# Altium PCB STM32F407VET6_4Layer_PCB.PcbDoc (part 3 of 3)
Units mm, origin at the board's own origin, x right, y up, seen from the top; angles counter-clockwise.
Board outline 86 x 80 mm, 4 copper layers (L1, L2, L3, L4), stack 0.999 mm thick; 172 components, 128 nets, 654 pads, 524 vias.
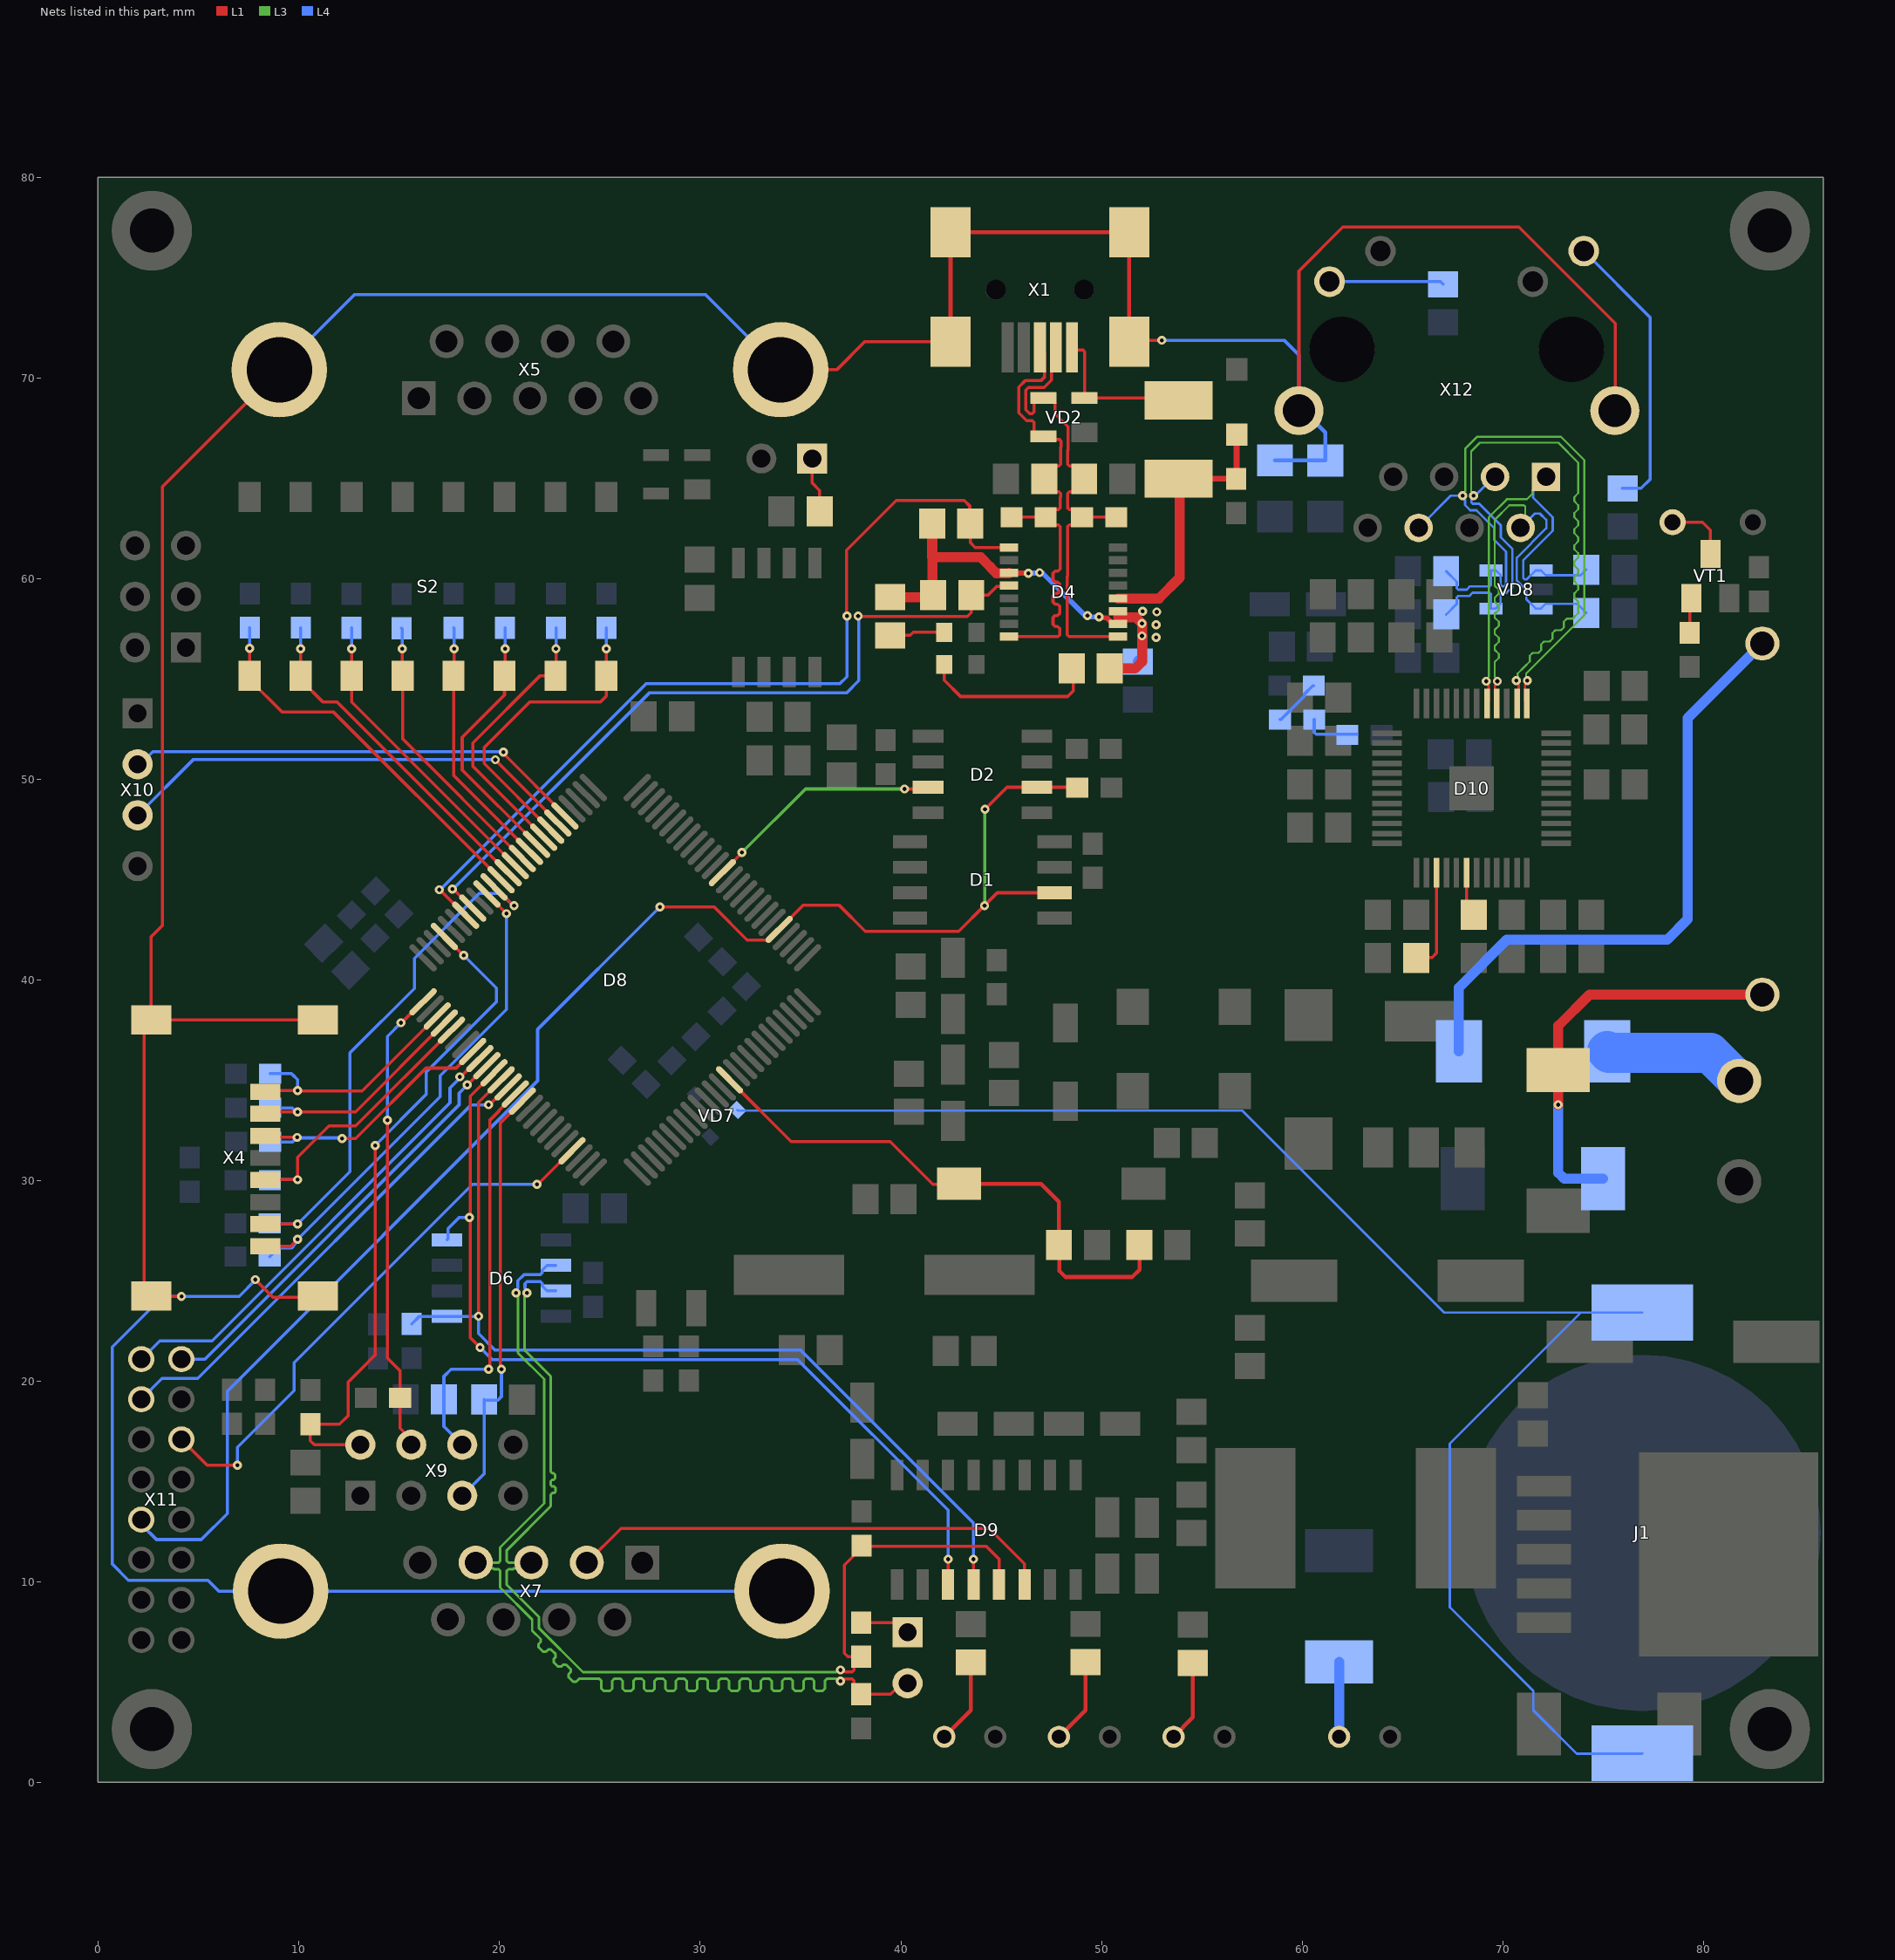
[diagram p5: the nets of this part, all layers, seen from the top]

## Via types
v1: diameter 0.45, hole 0.2, L1 to L4, 524 vias

## Nets (pads, with @x,y where several pads share a name; then routed paths per layer and width w, separated by ;. In a path a pad name is that pad's centre, name@x,y a point inside that pad or via, vN(x,y) a via of type N, cw(c..) or ccw(c..) an arc to the next point about the centre after c; other vN are vias at no path point) (continued)
NetD10_39: D10.39 R46.1 | length 5.1
  L1 w0.155: R46.1@65.684,41.097 65.709,41.121 66.476,41.121 66.7,41.346 D10.39@66.7,45.339
NetD10_42: D10.42 R47.1 | length 2.2
  L1 w0.155: D10.42@68.199,45.339 68.199,43.612 R47.1@68.555,43.256
NetF1_2: F1.2 R4.1 | length 31.3
  L4 w0.5: F1.2@67.818,36.449 67.818,39.624 70.206,42.012 78.207,42.012 79.223,43.028 79.223,53.053 R4.1@82.942,56.772
NetF2_1: F2.1 VD2.2 X1.1 | length 9.1
  L1 w0.155: X1.1@48.529,71.517 48.641,71.405 49.067,71.405 49.158,71.314 VD2.2@49.158,69.007 F2.1@55.072,69.007 ; F2.1@53.8,68.933 F2.1@53.896,68.837
NetG1_2: G1.2 VT1.C | length 3.2
  L1 w0.155: G1.2@78.467,62.814 79.954,62.814 80.35,62.418 VT1.C@80.35,61.23
NetHL1_1: HL1.1 R8.2 | length 3.7
  L4 w0.5: HL1.1@61.849,2.286 R8.2@61.849,6.02
NetHL2_1: HL2.1 R23.2 | length 9.5
  L1 w0.155: HL2.1@42.139,56.109 42.088,56.058 42.088,55.539 HL2.1@42.164,55.463 ; HL2.1@42.164,55.728 HL2.1@42.164,55.463 ; R23.2@48.514,55.524 48.59,55.448 48.59,54.407 48.311,54.127 42.977,54.127 42.164,54.94 HL2.1@42.164,55.463
NetHL3_1: HL3.1 R24.2 | length 2.8
  L1 w0.155: R24.2@39.472,57.175 40.462,57.175 40.615,57.328 HL3.1@42.164,57.328
NetHL4_1: HL4.1 R32.2 | length 4.1
  L1 w0.2: HL4.1@53.594,2.286 54.559,3.251 R32.2@54.559,5.969
NetHL5_1: HL5.1 R33.2 | length 4.3
  L1 w0.2: HL5.1@42.164,2.286 43.485,3.607 R33.2@43.485,5.994
NetHL6_1: HL6.1 R34.2 | length 4.3
  L1 w0.2: HL6.1@47.879,2.286 49.2,3.607 R34.2@49.2,6.01
NetJ1_1: J1.1 J1.2 VD7.1 | length 79.9
  L4 w0.119: VD7.1@31.852,33.528 31.887,33.493 57.008,33.493 67.069,23.431 73.901,23.431 ; J1.2@76.962,1.461 76.949,1.448 73.685,1.448 71.526,3.607 71.526,4.572 67.361,8.738 67.361,16.891 73.901,23.431 ; J1.1@76.962,23.431 73.901,23.431
NetR4_2: R4.2 VD1.1 VD3.1 | length 20.5
  L1 w0.5: v1(72.771,33.782) VD3.1@72.771,35.504 72.771,37.719 74.324,39.272 R4.2@82.942,39.272
  L4 w0.5: v1(72.771,33.782) 72.771,30.392 73.064,30.099 VD1.1@75.001,30.099
NetR9_2: R9.2 X3.1 | length 2.8
  L1 w0.155: X3.1@35.585,65.989 35.585,64.77 35.951,64.404 R9.2@35.951,63.348
NetR21_1: R21.1 X6.1 | length 2.5
  L1 w0.155: R21.1@38.024,7.976 39.853,7.976 X6.1@40.335,7.493
NetR39_2: R39.2 VT1.B | length 1.8
  L1 w0.155: R39.2@79.324,57.302 79.324,58.953 VT1.B@79.4,59.03
NetR44_2: R44.2 R51.1 | length 2.8
  L4 w0.155: R51.1@60.604,52.984 60.604,52.339 60.695,52.248 R44.2@62.74,52.248
NetR51_2: R51.2 R53.1 | length 2.4
  L4 w0.155: R51.2@58.904,52.984 58.954,52.984 60.106,54.136 60.106,54.238 60.529,54.661 R53.1@60.579,54.661
NetR69_1: R69.1 X12.9 | length 14.3
  L4 w0.155: X12.9@74.041,76.327 77.343,73.025 77.343,64.948 76.896,64.501 R69.1@75.971,64.501
NetR70_1: R70.1 X12.12 | length 5.7
  L4 w0.155: X12.12@61.366,74.803 66.899,74.803 R70.1@67.031,74.671
NJRST: D8.90 R36.1 X9.5 | length 21.4
  L1 w0.155: v1(20.091,20.599) 20.041,20.65 20.041,32.871 D8.90@21.135,33.965
  L4 w0.155: X9.5@18.136,14.3 19.233,15.397 R36.1@19.233,19.101 19.284,19.05 19.899,19.05 20.091,19.242 v1(20.091,20.599)
NRST: C36.1 D8.14 R31.1 S1.1 | length 27.9
  L1 w0.155: D8.14@31.458,35.025 34.531,31.953 39.472,31.953 39.472,31.942 41.594,29.82 42.873,29.82 S1.1@42.898,29.845
  L1 w0.2: S1.1@42.898,29.845 46.99,29.845 47.879,28.956 C36.1@47.879,26.797 47.904,26.772 47.904,25.502 48.209,25.197 51.537,25.197 51.892,25.552 51.892,26.787 R31.1@51.882,26.797
nW: D2.3 D8.38 | length 12
  L1 w0.155: D8.38@31.105,45.349 31.105,45.364 32.08,46.34 v1(32.08,46.355) ; v1(40.183,49.521) 41.272,49.521 D2.3@41.357,49.606
  L3 w0.155: v1(32.08,46.355) 35.246,49.521 v1(40.183,49.521)
PD3: D8.84 X11.1 | length 23.5
  L1 w0.155: v1(18.014,35.175) 18.063,35.175 18.974,36.086 D8.84@19.013,36.086
  L4 w0.155: X11.1@2.14,21.106 3.056,22.022 5.664,22.022 17.526,33.884 17.526,34.62 18.014,35.109 v1(18.014,35.175)
PD4: D8.85 X11.2 | length 21.6
  L1 w0.155: v1(18.39,34.773) 18.398,34.773 19.358,35.733 D8.85@19.367,35.733
  L4 w0.155: X11.2@4.14,21.106 5.308,21.106 17.983,33.782 17.983,34.366 v1(18.39,34.773)
PD7: D8.88 X11.3 | length 24.7
  L1 w0.155: v1(19.456,33.782) 19.498,33.782 20.388,34.672 D8.88@20.427,34.672
  L4 w0.155: X11.3@2.14,19.106 3.176,20.142 4.953,20.142 18.593,33.782 v1(19.456,33.782)
PE0: D8.97 X11.6 | length 27.8
  L1 w0.155: X11.6@4.14,17.106 5.422,15.824 v1(6.934,15.824) ; v1(21.869,29.82) 21.904,29.82 23.575,31.49 D8.97@23.609,31.49
  L4 w0.155: v1(6.934,15.824) 6.934,16.713 9.754,19.533 9.754,20.93 18.644,29.82 v1(21.869,29.82)
RD_N: D10.13 R65.1 VD8.5 X12.6 | length 35.9
  L1 w0.119: D10.13@71.196,53.772 71.116,53.852 71.116,54.517 71.114,54.519 71.114,54.71 71.23,54.825 v1(71.23,54.915)
  L3 w0.1: v1(68.005,64.135) 68.005,64.23 68.13,64.355 68.13,66.471 68.735,67.077 72.895,67.077 74.066,65.905 74.066,58.598 74.066,58.169 71.164,55.266 71.164,54.981 v1(71.23,54.915)
  L4 w0.119: X12.6@65.811,62.535 67.412,64.135 v1(68.005,64.135) 68.005,64.045 68.12,63.93 68.12,63.669 68.377,63.413 68.698,63.413 69.585,62.526 69.585,61.926 70.166,61.344 70.166,59.721 70.066,59.621 69.967,59.621 69.898,59.691 69.898,60.171 69.657,60.411 VD8.5@69.413,60.411 69.413,59.691 69.343,59.621 68.368,59.621 68.204,59.457 67.778,59.457 67.708,59.527 67.708,59.845 R65.1@67.178,60.376
RD_P: D10.14 R63.1 VD8.4 X12.3 | length 35.9
  L1 w0.119: v1(70.68,54.915) 70.68,54.825 70.795,54.71 70.795,54.519 70.794,54.517 70.794,53.852 D10.14@70.714,53.772
  L3 w0.1: v1(68.555,64.135) 68.555,64.23 68.43,64.355 68.43,66.347 68.859,66.777 72.771,66.777 73.766,65.781 73.766,64.313 73.766,64.263 73.566,64.063 73.566,63.863 73.766,63.663 73.766,63.463 73.566,63.263 73.566,63.063 73.766,62.863 73.766,62.663 73.566,62.463 73.566,62.263 73.766,62.063 73.766,61.863 73.566,61.663 73.566,61.463 73.766,61.263 73.766,61.063 73.566,60.863 73.566,60.663 73.766,60.463 73.766,60.263 73.566,60.063 73.566,59.863 73.766,59.663 73.766,59.463 73.566,59.263 73.566,59.063 73.766,58.863 73.766,58.598 73.766,58.293 73.51,58.037 73.475,58.001 73.192,58.001 73.05,57.86 73.05,57.577 72.909,57.436 72.626,57.436 72.485,57.294 72.485,57.011 72.343,56.87 72.06,56.87 71.919,56.728 71.919,56.446 71.778,56.304 71.495,56.304 71.353,56.163 71.353,55.88 71.079,55.605 70.747,55.273 70.747,54.982 v1(70.68,54.915)
  L4 w0.119: R63.1@67.183,58.217 67.711,58.745 67.711,59.068 67.781,59.138 68.336,59.138 68.5,59.302 69.343,59.302 69.413,59.232 VD8.4@69.413,58.511 69.657,58.511 69.898,58.752 69.898,59.232 69.967,59.302 70.198,59.302 70.485,59.589 70.485,61.476 69.904,62.058 69.904,62.658 68.83,63.732 68.509,63.732 68.439,63.801 68.439,63.93 68.555,64.045 v1(68.555,64.135) 68.618,64.135 69.558,65.075 X12.3@69.621,65.075
RS485_N: D6.6 R22.2 X6.2 X7.4 | length 56.2
  L1 w0.155: v1(36.982,5.066) 37.039,5.122 37.18,5.122 37.221,5.163 37.576,5.163 37.667,5.072 37.667,4.763 R22.2@38.024,4.406 39.493,4.406 40.04,4.953 X6.2@40.335,4.953
  L3 w0.13: v1(20.811,24.409) 20.811,24.323 20.921,24.213 20.921,21.411 22.22,20.112 22.22,13.914 20.028,11.722 20.028,11.044 19.952,10.968 X7.4@18.808,10.968 19.106,10.67 19.686,10.67 19.718,10.638 19.952,10.638 20.028,10.562 20.028,9.721 21.623,8.126 21.623,7.577 21.623,7.573 21.667,7.529 22.042,7.154 22.042,7.004 21.941,6.904 21.941,6.754 22.166,6.529 22.316,6.529 22.417,6.629 22.566,6.629 22.791,6.405 22.791,6.255 22.691,6.154 22.691,6.004 22.916,5.78 23.066,5.78 23.166,5.88 23.316,5.88 23.541,5.655 23.541,5.505 23.44,5.405 23.44,5.255 23.665,5.03 23.815,5.03 23.961,5.176 24.251,5.176 24.377,5.176 24.972,5.176 25.078,5.07 25.078,4.682 25.184,4.576 25.502,4.576 25.608,4.682 25.608,5.07 25.714,5.176 26.032,5.176 26.138,5.07 26.138,4.682 26.244,4.576 26.562,4.576 26.668,4.682 26.668,5.07 26.774,5.176 27.092,5.176 27.198,5.07 27.198,4.682 27.304,4.576 27.622,4.576 27.728,4.682 27.728,5.07 27.834,5.176 28.152,5.176 28.258,5.07 28.258,4.682 28.364,4.576 28.682,4.576 28.788,4.682 28.788,5.07 28.894,5.176 29.212,5.176 29.318,5.07 29.318,4.682 29.424,4.576 29.742,4.576 29.848,4.682 29.848,5.07 29.954,5.176 30.272,5.176 30.378,5.07 30.378,4.682 30.484,4.576 30.802,4.576 30.908,4.682 30.908,5.07 31.014,5.176 31.332,5.176 31.438,5.07 31.438,4.682 31.544,4.576 31.862,4.576 31.968,4.682 31.968,5.07 32.074,5.176 32.392,5.176 32.498,5.07 32.498,4.682 32.604,4.576 32.922,4.576 33.028,4.682 33.028,5.07 33.134,5.176 33.452,5.176 33.558,5.07 33.558,4.682 33.664,4.576 33.982,4.576 34.088,4.682 34.088,5.07 34.194,5.176 34.512,5.176 34.618,5.07 34.618,4.682 34.724,4.576 35.042,4.576 35.148,4.682 35.148,5.07 35.254,5.176 35.572,5.176 35.678,5.07 35.678,4.682 35.784,4.576 36.102,4.576 36.208,4.682 36.208,5.07 36.314,5.176 36.729,5.176 36.786,5.176 36.896,5.066 v1(36.982,5.066)
  L4 w0.155: 20.909,24.648 20.909,25.014 21.218,25.324 22.028,25.324 22.118,25.414 22.118,25.533 22.366,25.781 D6.6@22.803,25.781
RS485_P: D6.7 D9.13 R20.1 R21.2 X7.3 | length 56.2
  L1 w0.155: v1(36.982,5.616) 37.039,5.559 37.18,5.559 37.221,5.518 37.576,5.518 37.667,5.609 37.667,5.919 R21.2@38.024,6.276 37.362,6.276 37.187,6.45 37.187,10.848 38.125,11.786 44.247,11.786 44.895,11.137 D9.13@44.895,9.871
  L3 w0.13: v1(21.361,24.409) 21.361,24.323 21.251,24.213 21.251,21.548 22.55,20.249 22.55,16.576 22.55,15.497 22.626,15.421 22.697,15.421 22.763,15.355 22.763,15.157 22.697,15.091 22.616,15.091 22.55,15.025 22.55,14.827 22.616,14.761 22.725,14.761 22.791,14.695 22.791,14.497 22.725,14.431 22.626,14.431 22.55,14.355 22.55,13.96 22.55,13.778 20.358,11.586 20.358,11.044 20.434,10.968 X7.3@21.578,10.968 21.28,10.67 20.7,10.67 20.668,10.638 20.434,10.638 20.358,10.562 20.358,9.858 21.953,8.263 21.953,7.71 24.157,5.506 36.786,5.506 36.896,5.616 v1(36.982,5.616)
  L4 w0.155: 21.264,24.648 21.264,24.867 21.365,24.968 22.028,24.968 22.118,24.878 22.118,24.759 22.366,24.511 D6.7@22.803,24.511
RX2: D6.1 D8.87 D9.12 R10.1 | length 48.3
  L1 w0.155: v1(18.948,23.241) 18.948,33.9 D8.87@20.074,35.025 ; D9.12@43.625,9.871 v1(43.625,11.138)
  L4 w0.155: R10.1@15.621,22.86 16.002,23.241 D6.1@17.379,23.241 v1(18.948,23.241) 18.948,22.377 19.761,21.565 35.001,21.565 43.625,12.941 v1(43.625,11.138)
SCK: D1.2 D2.6 D8.30 R5.2 X11.9 | length 76.8
  L1 w0.155: v1(27.991,43.637) 30.694,43.637 32.34,41.99 33.403,41.99 D8.30@33.933,42.521 35.147,43.735 36.91,43.735 38.227,42.418 42.875,42.418 v1(44.171,43.713) 44.806,44.348 D1.2@47.662,44.348 ; v1(44.196,48.514) 45.288,49.606 D2.6@46.781,49.606 48.768,49.606 R5.2@48.793,49.581
  L3 w0.155: v1(44.171,43.713) 44.183,43.726 44.183,48.501 v1(44.196,48.514)
  L4 w0.155: X11.9@2.14,13.106 2.14,12.871 2.896,12.116 5.131,12.116 6.426,13.411 6.426,19.507 21.895,34.976 21.895,37.541 v1(27.991,43.637)
SDIO_CLK: D8.80 R18.1 X4.5 | length 14.4
  L1 w0.155: X4.5@8.331,30.033 8.347,30.048 v1(9.931,30.048) 9.931,31.166 11.493,32.728 12.827,32.728 D8.80@17.599,37.5
  L4 w0.155: R18.1@8.546,30.023 8.572,30.048 v1(9.931,30.048)
SDIO_CMD: D8.83 R17.1 X4.3 | length 13.6
  L1 w0.155: X4.3@8.331,32.233 8.407,32.156 v1(9.906,32.156) ; v1(12.141,32.106) 12.827,32.106 16.332,35.611 17.831,35.611 D8.83@18.66,36.44
  L4 w0.155: R17.1@8.56,31.928 9.677,31.928 v1(9.906,32.156) 9.931,32.131 12.116,32.131 v1(12.141,32.106)
SDIO_D0: D8.65 R12.1 X4.7 | length 26.6
  L1 w0.155: X4.7@8.331,27.833 8.337,27.838 v1(9.931,27.838) ; D8.65@19.72,44.642 19.754,44.642 20.687,43.709 v1(20.721,43.709)
  L4 w0.155: R12.1@8.533,27.864 8.558,27.838 v1(9.931,27.838) 12.544,30.451 12.544,36.369 15.748,39.573 15.748,41.072 18.999,44.323 20.066,44.323 20.68,43.709 v1(20.721,43.709)
SDIO_D1: D8.66 R13.1 X4.8 | length 25.5
  L1 w0.155: X4.8@8.331,26.733 8.343,26.721 9.576,26.721 v1(9.931,27.076) ; D8.66@19.367,44.289 D8.66@19.367,44.289 20.345,43.308 v1(20.345,43.307)
  L4 w0.155: R13.1@8.534,26.213 8.957,26.635 9.612,26.635 9.722,26.745 9.722,26.787 9.931,26.997 v1(9.931,27.076) 17.043,34.188 17.043,35.23 20.345,38.532 v1(20.345,43.307)
SDIO_D2: D8.78 R14.1 X4.1 | length 12.2
  L1 w0.155: X4.1@8.331,34.433 8.392,34.493 v1(9.931,34.493) 9.957,34.468 13.152,34.468 D8.78@16.892,38.207
  L4 w0.155: R14.1@8.558,35.331 9.627,35.331 9.677,35.281 9.931,35.027 v1(9.931,34.493)
SDIO_D3: D8.79 R15.1 X4.2 | length 12.2
  L1 w0.155: X4.2@8.331,33.333 8.425,33.426 v1(9.931,33.426) 12.818,33.426 D8.79@17.245,37.854
  L4 w0.155: R15.1@8.558,33.63 9.648,33.63 9.852,33.426 v1(9.931,33.426)
SHLD: C53.2 R68.2 X1.6 X1.7 X1.8 X1.9 X4.9 X4.10 X4.11 X4.12 X5.10 X5.11 X7.10 X7.11 X12.S1 X12.S2 | length 219.9
  L1 w0.155: v1(4.14,24.232) 2.657,24.232 2.286,24.603 2.286,37.662 X4.12@2.631,38.008 ; v1(7.823,25.07) 8.699,24.194 10.867,24.194 X4.10@10.931,24.258 ; X5.10@9.017,70.409 3.2,64.592 3.2,42.723 2.631,42.154 X4.12@2.631,38.008 ; X4.9@10.931,38.008 X4.12@2.631,38.008 ; X5.11@34.007,70.409 36.805,70.409 38.212,71.817 X1.7@42.479,71.817 ; X1.6@51.379,71.817 51.445,71.882 v1(53.01,71.882) ; X12.S1@59.842,68.377 59.842,75.336 62.027,77.521 70.815,77.521 75.616,72.72 75.616,68.402 X12.S2@75.59,68.377
  L1 w0.2: X1.7@42.479,71.817 X1.9@42.479,77.267 X1.8@51.379,77.267 X1.6@51.379,71.817
  L4 w0.155: v1(7.823,25.07) 7.823,25.044 7.01,24.232 v1(4.14,24.232) 3.212,24.232 0.686,21.706 0.686,10.897 1.499,10.084 5.461,10.084 5.997,9.548 X7.11@9.083,9.548 X7.10@34.073,9.548 ; X5.10@9.017,70.409 12.773,74.164 30.251,74.164 X5.11@34.007,70.409 ; v1(53.01,71.882) 59.106,71.882 59.842,71.145 X12.S1@59.842,68.377
  L4 w0.2: C53.2@58.649,65.894 58.652,65.891 R68.2@61.163,65.891 61.163,67.285 60.071,68.377 X12.S1@59.842,68.377
SWCLK: D8.76 R41.2 X9.4 | length 23.3
  L1 w0.155: v1(14.402,33.02) 14.402,21.158 15.035,20.525 R41.2@15.035,19.177 15.035,17.669 15.596,17.108 X9.4@15.596,16.84 ; v1(15.088,37.871) 15.115,37.871 16.158,38.915 D8.76@16.185,38.915
  L4 w0.155: v1(14.402,33.02) 14.402,37.186 v1(15.088,37.871)
SWDIO: D8.72 R38.1 X9.2 | length 33.5
  L1 w0.155: X9.2@13.056,16.84 10.77,16.84 10.566,17.043 R38.1@10.566,17.87 10.58,17.856 12.014,17.856 12.446,18.288 12.446,19.964 13.792,21.311 v1(13.792,31.75) ; D8.72@17.245,42.167 17.257,42.167 18.2,41.224 v1(18.212,41.224)
  L4 w0.155: v1(13.792,31.75) 16.332,34.29 16.332,35.408 19.837,38.913 19.837,39.599 v1(18.212,41.224)
SWITCH1: D8.64 R54.1 S2.1 | length 19.3
  L1 w0.155: v1(7.539,56.528) 7.539,55.173 S2.1@7.544,55.169 7.544,54.969 9.147,53.365 11.704,53.365 D8.64@20.074,44.996
  L4 w0.155: v1(7.539,56.528) 7.539,57.554 R54.1@7.544,57.558
SWITCH2: D8.63 R55.1 S2.2 | length 16.9
  L1 w0.155: v1(10.084,56.515) S2.2@10.084,55.169 10.084,54.969 11.205,53.848 11.913,53.848 20.411,45.349 D8.63@20.427,45.349
  L4 w0.155: v1(10.084,56.515) R55.1@10.084,57.558
SWITCH3: D8.62 R56.1 S2.3 | length 15.2
  L1 w0.155: v1(12.624,56.515) S2.3@12.624,55.169 12.624,53.86 D8.62@20.781,45.703
  L4 w0.155: v1(12.624,56.515) R56.1@12.624,57.545
SWITCH4: D8.61 R57.1 S2.4 | length 14
  L1 w0.155: v1(15.138,56.515) 15.138,55.194 S2.4@15.164,55.169 15.164,52.019 21.127,46.056 D8.61@21.135,46.056
  L4 w0.155: R57.1@15.113,57.533 15.138,57.507 v1(15.138,56.515)
SWITCH5: D8.60 R59.1 S2.5 | length 12.7
  L1 w0.155: v1(17.729,56.515) 17.729,55.194 S2.5@17.704,55.169 17.704,50.194 D8.60@21.488,46.41
  L4 w0.155: R59.1@17.704,57.556 17.729,57.531 v1(17.729,56.515)
SWITCH6: D8.59 R62.1 S2.6 | length 13.2
  L1 w0.155: v1(20.269,56.515) 20.269,55.194 S2.6@20.244,55.169 20.244,54.204 18.136,52.095 18.136,50.47 D8.59@21.842,46.763
  L4 w0.155: v1(20.269,56.515) R62.1@20.269,57.556
SWITCH7: D8.58 R64.1 S2.7 | length 14.1
  L1 w0.155: D8.58@22.195,47.117 18.664,50.648 18.664,51.811 22.022,55.169 S2.7@22.784,55.169 22.809,55.194 v1(22.809,56.515)
  L4 w0.155: v1(22.809,56.515) R64.1@22.809,57.556
SWITCH8: D8.57 R66.1 S2.8 | length 16.1
  L1 w0.155: D8.57@22.549,47.471 19.228,50.792 19.228,51.587 21.488,53.848 25.019,53.848 25.324,54.153 S2.8@25.324,55.169 v1(25.324,56.515)
  L4 w0.155: v1(25.324,56.515) R66.1@25.324,57.556
SWO: D8.89 R40.1 X9.6 | length 20.4
  L1 w0.155: v1(19.456,20.599) 19.507,20.65 19.507,33.005 19.98,33.478 19.98,33.518 D8.89@20.781,34.318
  L4 w0.155: X9.6@18.136,16.84 17.221,17.755 R40.1@17.221,19.101 17.221,20.244 17.577,20.599 v1(19.456,20.599)
TD_N: D10.16 R61.1 VD8.3 X12.2 | length 22.8
  L1 w0.119: 69.616,54.684 69.616,54.519 69.617,54.517 69.617,53.852 D10.16@69.698,53.772
  L3 w0.1: v1(69.731,54.889) 69.731,54.984 69.606,55.109 69.606,55.801 69.606,55.851 69.806,56.051 69.806,56.251 69.606,56.451 69.606,56.651 69.806,56.851 69.806,57.051 69.606,57.251 69.606,57.451 69.806,57.651 69.806,57.851 69.606,58.051 69.606,58.251 69.806,58.451 69.806,58.651 69.606,58.851 69.606,59.051 69.806,59.251 69.806,59.451 69.606,59.651 69.606,59.792 69.606,62.934 70.33,63.657 71.061,63.657 71.12,63.599 71.12,62.763 X12.2@70.891,62.535
  L4 w0.119: X12.2@70.891,62.535 71.603,63.246 71.853,63.246 72.173,62.927 72.173,62.515 70.704,61.046 70.704,59.903 71.178,59.429 71.178,58.971 71.638,58.511 VD8.3@71.913,58.511 72.153,58.752 73.709,58.752 R61.1@74.168,58.293
TD_P: D10.17 R58.1 VD8.1 X12.1 | length 22.8
  L1 w0.119: D10.17@69.215,53.772 69.295,53.852 69.295,54.517 69.297,54.519 69.297,54.684
  L3 w0.1: v1(69.181,54.889) 69.181,54.984 69.306,55.109 69.306,60.325 69.306,63.058 70.206,63.957 71.196,63.957 71.5,64.261 71.5,64.414 X12.1@72.161,65.075
  L4 w0.119: X12.1@72.161,65.075 71.51,64.423 71.51,64.041 71.904,63.646 72.492,63.059 72.492,62.382 71.023,60.914 71.023,60.035 71.093,59.965 71.192,59.965 71.638,60.411 VD8.1@71.913,60.411 72.153,60.171 73.887,60.171 R58.1@74.168,60.452
TX2: D6.4 D8.86 D9.11 | length 46.7
  L1 w0.155: v1(18.495,28.169) 18.542,28.122 18.542,22.174 v1(19.025,21.692) ; v1@18.542,28.169 18.542,34.201 D8.86@19.72,35.379 ; D9.11@42.355,9.871 v1(42.355,11.138)
  L4 w0.155: D6.4@17.379,27.051 17.424,27.096 17.424,27.61 17.983,28.169 v1(18.495,28.169) ; v1(19.025,21.692) 19.634,21.082 34.849,21.082 42.355,13.576 v1(42.355,11.138)
TxD: D9.14 X7.2 | length 24.3
  L1 w0.155: X7.2@24.348,10.968 26.055,12.675 44.399,12.675 46.165,10.909 D9.14@46.165,9.871
USART1_Rx: D4.1 D8.69 R16.1 | length 44
  L1 w0.155: v1(16.993,44.501) 17.013,44.501 18.286,43.228 D8.69@18.306,43.228 ; v1(37.313,58.141) 37.287,58.166 37.287,61.417 39.774,63.904 43.157,63.904 43.434,63.627 43.434,62.769 R16.1@43.459,62.743 43.459,61.798 43.701,61.557 D4.1@45.39,61.557
  L4 w0.155: v1(16.993,44.501) 17.043,44.501 27.305,54.762 36.957,54.762 37.313,55.118 v1(37.313,58.141)
USART1_Tx: D4.4 D8.68 R19.1 | length 37.9
  L1 w0.155: v1(17.653,44.526) 17.684,44.526 18.629,43.581 D8.68@18.66,43.581 ; v1(37.871,58.141) 37.897,58.115 43.307,58.115 43.51,58.318 R19.1@43.51,59.182 44.348,59.182 44.78,59.614 45.352,59.614 D4.4@45.39,59.652
  L4 w0.155: v1(17.653,44.526) 17.678,44.526 27.457,54.305 37.287,54.305 37.897,54.915 37.897,58.115 v1(37.871,58.141)
USART3_Rx: D8.56 X10.3 | length 23.4
  L1 w0.155: v1(19.787,50.978) 19.787,50.959 22.902,47.843 D8.56@22.902,47.824
  L4 w0.155: X10.3@1.956,48.209 4.724,50.978 v1(19.787,50.978)
USART3_Tx: D8.55 X10.2 | length 23
  L1 w0.155: v1(20.189,51.353) 20.189,51.284 23.256,48.217 D8.55@23.256,48.178
  L4 w0.155: X10.2@1.956,50.749 2.083,50.749 2.714,51.38 20.161,51.38 v1(20.189,51.353)
USB_N: C5.2 D4.9 R7.1 R7.2 VD2.3 X1.2 | length 24.3
  L1 w0.153: X1.2@47.729,71.517 47.506,71.293 47.506,69.891 47.146,69.531 46.363,69.531 46.229,69.397 46.229,68.416 46.422,68.223 46.548,68.223 46.638,68.313 46.638,68.788 46.856,69.007 VD2.3@47.108,69.007 47.463,69.007 47.682,68.788 47.682,68.222 48.331,67.572 48.331,66.414 48.317,66.4 48.317,65.704 48.407,65.615 48.565,65.615 49.139,65.041 C5.2@49.139,64.973 49.139,64.905 48.565,64.331 48.407,64.331 48.317,64.242 48.317,63.924 48.303,63.91 48.303,63.538 48.392,63.449 48.655,63.449 R7.2@49.036,63.068 ; R7.1@50.736,63.068 R7.2@49.036,63.068 ; D4.9@50.825,57.112 48.374,57.112 48.284,57.202 48.284,60.111 48.303,60.13 48.303,62.598 48.392,62.688 48.655,62.688 R7.2@49.036,63.068
USB_P: C4.2 D4.8 R6.1 R6.2 VD2.4 X1.3 | length 24.3
  L1 w0.153: D4.8@45.39,57.112 47.841,57.112 47.931,57.202 47.931,57.429 47.931,57.506 47.821,57.617 47.696,57.617 47.585,57.727 47.585,58.059 47.696,58.17 47.821,58.17 47.931,58.28 47.931,58.612 47.821,58.723 47.696,58.723 47.585,58.833 47.585,59.165 47.696,59.276 47.821,59.276 47.931,59.386 47.931,59.718 47.821,59.829 47.696,59.829 47.585,59.939 47.585,60.271 47.696,60.382 47.839,60.382 47.95,60.492 47.95,60.782 47.95,62.598 47.86,62.688 47.597,62.688 R6.1@47.217,63.068 ; R6.2@45.517,63.068 R6.1@47.217,63.068 ; X1.3@46.929,71.517 47.153,71.293 47.153,70.253 47.153,70.037 47,69.884 46.217,69.884 45.876,69.543 45.876,68.27 46.275,67.87 46.548,67.87 46.638,67.78 46.638,67.305 46.856,67.087 VD2.4@47.108,67.087 47.246,66.949 47.889,66.949 47.978,66.859 47.978,66.561 47.964,66.546 47.964,65.705 47.874,65.615 47.716,65.615 47.142,65.041 C4.2@47.142,64.973 47.142,64.905 47.716,64.331 47.874,64.331 47.964,64.242 47.964,64.07 47.95,64.056 47.95,63.538 47.86,63.449 47.597,63.449 R6.1@47.217,63.068
VBUS: C1.2 D4.12 F2.2 VD4.A | length 13.6
  L1 w0.3: F2.2@53.848,64.985 56.707,64.985 C1.2@56.718,64.973 56.744,64.999 VD4.A@56.744,67.183
  L1 w0.5: D4.12@50.825,59.017 52.87,59.017 53.899,60.046 53.899,64.934 F2.2@53.848,64.985
VCC: F1.1 X2.1 | length 7.2
  L4 w2: F1.1@75.218,36.449 75.294,36.373 80.333,36.373 81.734,34.972 X2.1@81.788,34.972
VCCIO: C9.2 D4.3 D4.10 D4.11 R16.2 R19.2 R23.1 R24.1 | length 24.4
  L1 w0.25: D4.3@45.39,60.287 45.396,60.281 46.349,60.281 v1(46.355,60.274) ; v1(49.886,58.09) 49.924,58.052 50.267,58.052 50.571,57.747 D4.10@50.825,57.747
  L1 w0.5: R24.1@39.472,59.075 41.504,59.075 R19.2@41.61,59.182 41.585,59.207 41.585,61.062 ; 41.559,61.062 R16.2@41.559,62.743 41.585,62.718 41.585,61.062 ; D4.3@45.39,60.287 45.377,60.274 44.752,60.274 44.459,60.567 44.459,60.585 43.983,61.062 41.585,61.062 ; R23.1@50.414,55.524 51.689,55.524 52.019,55.855 v1(52.019,57.15) v1(52.019,57.772) 51.726,58.064 50.825,58.064
  L4 w0.25: v1(46.355,60.274) 47.066,60.274 49.251,58.09 v1(49.886,58.09)
  L4 w0.5: C9.2@51.816,55.875 52.019,56.078 v1(52.019,57.15)
  other v1: 52.73,57.074 52.73,57.709 49.301,58.166 52.756,58.344 52.045,58.369 46.914,60.3
pads on no net: BQ3.1 D3.5 D4.2 D4.6 D4.15 D4.16 D8.5 D8.7 D8.15 D8.17 D8.18 D8.23 D8.36 D8.40 D8.41 D8.42 D8.44 D8.45 D8.46 D8.53 D8.54 D8.67 D8.81 D8.82 D8.92 D8.93 D8.98 D9.7 D9.8 D9.9 D9.10 D10.1 D10.5 D10.6 D10.8 D10.9 D10.10 D10.11 D10.12 D10.25 D10.33 D10.38 D10.41 D10.45 D10.46 VD5.2 X1.4 X1.None X5.4 X5.6 X5.8 X7.6 X7.7 X7.8 X12.7 X12.None

## Polygon pours and split planes (outlines as drawn)
5V on L1 "5V_L01_P014" (solid, pour order 14): 59.69,9.525 55.626,9.525 55.626,17.399 55.245,17.78 53.721,17.78 53.721,19.177 57.785,19.177 58.674,20.066 58.674,21.59 58.293,21.971 56.642,21.971 56.642,28.448 65.405,28.448 67.564,30.607 67.564,32.639 70.536,32.639 70.536,30.404 66.802,26.67 62.865,26.67 62.23,26.035 62.23,22.86 62.23,19.685 59.69,17.145
GND on L1 "GND_L01_P056" (solid, pour order 56): 5.715,79.375 80.645,79.375 80.645,74.295 85.09,74.295 85.09,5.715 81.407,5.715 80.645,4.953 80.645,0.635 5.715,0.635 5.715,5.715 0.635,5.715 0.635,74.295 5.715,74.295
5V on L1 "5V_L01_P020" (solid, pour order 20): 59.69,9.779 59.69,1.143 59.182,0.635 20.447,0.635 16.383,4.699 15.748,5.334 7.493,5.334 4.572,8.255 1.397,8.255 1.397,9.957 5.131,9.957 8.103,6.985 15.748,6.985 16.383,7.62 16.383,9.017 18.44,9.017 18.44,5.563 22.403,1.6 56.591,1.6 56.947,1.956 56.947,8.204 55.626,9.525 55.626,9.779
3V3 on L1 "3V3_L01_P053" (solid, pour order 53): 4.191,30.099 2.794,30.099 2.794,35.814 4.191,35.814
5V on L1 "5V_L01_P018" (solid, pour order 18): 67.564,33.274 76.302,33.274 78.74,30.836 78.74,28.931 80.188,27.483 82.55,27.483 84.023,28.956 84.023,60.02 81.915,60.02 81.534,60.401 81.534,63.678 85.344,63.678 85.344,27.102 83.261,25.019 79.375,25.019 76.327,28.067 76.327,29.82 75.768,30.378 67.564,30.378
3V3 on L1 "3V3_L01_P052" (solid, pour order 52): 16.967,40.564 15.646,41.885 12.675,38.913 13.995,37.592
VCCIO on L1 "VCCIO_L01_P051" (solid, pour order 51): 38.608,58.42 42.291,58.42 42.291,59.944 42.367,60.02 47.193,60.02 47.193,60.579 44.831,60.579 44.069,61.341 42.291,61.341 42.291,63.5 40.894,63.5 40.767,63.373 40.767,60.452 40.513,60.198 38.608,60.198
VCCIO on L1 "VCCIO_L01_P049" (solid, pour order 49): 49.657,54.61 52.984,54.61 52.984,58.598 49.251,58.598 49.251,57.747 51.448,57.747 51.587,57.607 51.587,56.591 51.384,56.388 49.657,56.388
3V3 on L1 "3V3_L01_P048" (solid, pour order 48): 39.751,50.927 39.751,47.65 40.157,47.244 41.3,47.244 42.316,46.228 53.34,46.228 53.34,40.234 51.714,40.234 51.714,44.45 48.997,44.45 48.768,44.679 48.768,44.933 48.616,45.085 39.624,45.085 38.735,45.974 38.735,50.927
3V3 on L1 "3V3_L01_P046" (solid, pour order 46): 26.035,48.514 27.686,50.165 27.686,52.07 27.94,52.324 27.94,59.817 26.035,59.817 26.035,48.895
3V3 on L1 "3V3_L01_P045" (solid, pour order 45): 35.56,52.324 35.56,53.975 35.077,54.458 35.077,57.861 32.004,57.861 32.004,56.515 33.909,56.515 33.909,52.324
3V3 on L1 "3V3_L01_P043" (solid, pour order 43): 3.556,57.404 5.207,57.404 5.207,55.296 6.223,54.28 6.223,40.564 4.572,40.564 4.572,53.594 3.556,54.61
3V3 on L1 "3V3_L01_P040" (solid, pour order 40): 13.894,15.113 8.966,15.113 8.966,17.348 9.906,18.288 9.906,18.517 10.058,18.669 12.065,18.669 12.065,20.066 4.191,27.94 4.191,30.607 9.144,30.607 9.144,31.623 2.794,31.623 2.794,27.686 9.652,20.828 9.652,20.015 8.966,19.329 8.966,18.974 8.534,18.542 6.096,18.542 6.096,17.221 6.985,17.221 7.417,16.789 7.417,12.116 13.894,12.116
3V3 on L1 "3V3_L01_P039" (solid, pour order 39): 20.436,19.933 25.135,19.933 28.056,17.012 28.056,14.605 24.867,12.11 7.99,12.11 6.288,10.408 1.462,10.408 1.462,11.805 5.45,11.805 8.752,15.107 12.181,15.107 16.245,15.107 16.499,14.853 16.499,13.71 16.779,13.431 23.901,13.431 25.897,15.153 25.897,16.174 23.764,18.307 20.436,18.307
3V3 on L1 "3V3_L01_P035" (solid, pour order 35): 25.019,27.991 26.924,27.991 26.924,29.718 26.086,30.556 26.086,34.849 27.381,36.144 28.981,34.544 29.489,34.544 30.874,33.159 31.204,33.49 29.82,34.874 29.82,35.636 28.461,36.995 29.959,38.494 31.115,37.338 32.336,37.338 33.747,35.923 34.087,36.263 32.664,37.694 32.664,37.922 30.912,39.675 31.521,40.284 33.452,40.284 35.535,42.367 35.192,42.71 33.858,41.377 30.709,41.377 25.095,35.763 25.095,31.191 23.82,29.916
3V3 on L1 "3V3_L01_P032" (solid, pour order 32): 20.447,18.288 26.797,18.288 25.908,19.177 25.908,24.257 22.987,24.257 22.987,20.701 22.602,20.316 20.452,20.315
3V3 on L1 "3V3_L01_P029" (solid, pour order 29): 40.386,1.905 33.299,1.905 28.397,6.807 28.397,9.576 28.194,9.779 25.908,9.779 25.908,12.065 28.804,12.065 30.201,10.668 30.201,8.026 34.671,3.556 40.437,3.556
3V3 on L1 "3V3_L01_P028" (solid, pour order 28): 55.372,8.89 53.721,8.89 53.086,9.525 53.086,11.43 48.387,11.43 48.387,8.763 42.418,8.763 41.402,7.747 41.402,4.521 40.437,3.556 37.465,3.556 37.465,1.905 40.64,1.905 42.545,3.81 42.545,6.858 42.672,6.985 55.372,6.985
3V3 on L1 "3V3_L01_P016" (solid, pour order 16): 44.196,40.005 44.196,38.354 46.99,38.354 47.371,37.973 47.371,36.576 49.022,36.576 49.022,37.465 49.276,37.719 52.959,37.719 54.102,36.576 54.102,29.083 53.086,28.067 53.086,24.46 55.88,24.46 55.88,29.845 56.515,30.48 61.595,30.48 61.595,35.814 60.579,35.814 59.055,34.29 59.055,33.02 58.801,32.766 56.007,32.766 55.499,33.274 55.499,37.719 53.213,40.005
3V3 on L1 "3V3_L01_P025" (solid, pour order 25): 53.34,37.719 53.34,42.012 57.937,46.609 60.477,46.609 60.833,46.965 60.833,54.966 59.106,54.966 59.106,48.616 58.826,48.336 56.845,48.336 53.34,44.831 53.34,52.146 51.892,53.594 45.974,53.594 45.974,51.562 47.625,51.562 48.006,51.181 48.26,50.927 49.276,50.927 49.403,51.054 49.403,52.07 49.53,52.197 51.054,52.197 51.714,51.537 51.714,39.903 48.87,39.903 48.87,37.719
3V3 on L1 "3V3_L01_P023" (solid, pour order 23): 67.818,73.533 67.818,64.694 67.462,64.338 67.462,63.932 68.021,63.373 69.215,63.373 69.215,60.096 66.116,60.096 65.964,59.944 65.964,56.261 62.23,56.261 62.23,60.071 62.611,60.071 64.059,61.519 66.929,61.519 67.132,61.722 67.132,62.763 66.078,63.817 66.078,73.533
3V3 on L1 "3V3_L01_P022" (solid, pour order 22): 73.279,43.307 73.279,43.942 77.343,48.006 77.343,63.5 74.905,63.5 74.93,63.475 74.93,62.103 74.346,61.519 69.799,61.519 69.215,62.103 69.215,63.373 67.539,63.373 67.539,60.096 75.159,60.096 75.438,59.817 75.438,48.438 73.228,46.228 70.993,46.228 70.993,44.45 70.612,44.069 70.612,43.414 70.455,43.256
5V on L1 "5V_L01_P021" (solid, pour order 21): 2.54,8.255 0.483,8.255 0.483,46.482 2.794,46.482 2.794,45.263 1.372,43.84 1.372,10.439 1.854,9.957 2.54,9.957
5V on L1 "5V_L01_P019" (solid, pour order 19): 81.534,61.087 81.534,71.476 75.032,77.978 58.09,77.978 57.607,77.495 57.607,69.85 55.855,69.85 55.855,78.105 55.321,78.638 33.477,78.638 25.603,70.764 25.603,70.739 24.486,71.857 32.004,79.375 77.749,79.375 85.344,71.78 85.344,61.109
NetD5_2 on L1 "NETD5_2_L01_P001" (solid, pour order 1): 65.659,16.764 65.659,9.652 65.659,4.699 69.012,1.346 70.866,1.346 70.866,4.496 69.977,4.496 68.453,6.02 68.453,9.652 69.723,9.652 69.723,12.319 73.406,12.319 73.406,13.843 69.85,13.843 69.723,13.97 69.723,16.764
3V3 on L1 "3V3_L01_P015" (solid, pour order 15): 66.929,30.48 66.929,36.068 67.691,36.83 69.85,36.83 71.12,38.1 71.12,40.132 71.247,40.259 73.279,40.259 73.279,44.831 71.882,46.228 70.993,46.228 70.993,44.069 69.723,44.069 69.723,39.878 69.088,39.243 64.897,39.243 64.516,39.624 64.516,41.91 63.119,41.91 63.119,36.322 62.611,35.814 60.579,35.814 59.055,34.29 59.055,30.48
NetC6_2 on L1 "NETC6_2_L01_P009" (solid, pour order 9): 70.866,17.145 67.31,17.145 67.31,19.05 69.977,19.05 69.977,18.161 70.866,18.161
NetC6_2 on L1 "NETC6_2_L01_P008" (solid, pour order 8): 70.612,18.161 70.612,14.224 75.565,14.224 75.565,21.336 73.025,21.336 73.025,18.796 72.39,18.161
NetC6_2 on L1 "NETC6_2_L01_P007" (solid, pour order 7): 71.12,29.718 74.422,29.718 74.422,25.781 75.692,24.511 75.692,23.876 76.581,23.876 76.581,20.828 72.136,20.828 72.136,23.876 72.869,23.876 72.136,23.876 71.628,25.146 71.628,26.924 71.12,27.432
NetR4_2 on L1 "NETR4_2_L01_P004" (solid, pour order 4): 83.82,40.64 83.82,37.77 75.235,37.77 74.422,36.957 74.422,33.655 71.12,33.655 71.12,37.592 73.406,39.878 75.616,39.878 76.378,40.64
GND on L4 "GND_L04_P058" (solid, pour order 58): 5.715,79.375 80.645,79.375 80.645,74.295 85.09,74.295 85.09,5.715 81.407,5.715 80.645,4.953 80.645,0.635 5.715,0.635 5.715,5.715 0.635,5.715 0.635,74.295 5.715,74.295
VCCIO on L4 "VCCIO_L04_P055" (solid, pour order 55): 51.054,55.22 52.984,55.22 52.984,58.598 50.089,58.598 50.089,57.531 51.029,57.531
3V3 on L4 "3V3_L04_P054" (solid, pour order 54): 3.556,54.61 4.572,53.594 6.223,53.594 6.223,54.28 5.207,55.296 5.207,57.658 3.556,57.658
3V3 on L4 "3V3_L04_P042" (solid, pour order 42): 7.493,25.654 7.493,35.966 6.223,35.966 6.223,31.75 4.521,31.75 4.191,32.08 4.191,37.719 5.715,39.243 12.344,39.243 13.576,38.011 14.897,39.332 12.624,41.605 11.532,40.513 6.477,40.513 6.223,40.767 6.223,46.457 4.572,46.457 4.572,40.284 2.794,38.506 2.794,30.48 2.819,30.455 5.969,30.455 6.096,30.328 6.096,25.654
VCCIO on L4 "VCCIO_L04_P050" (solid, pour order 50): 50.368,57.734 50.368,58.598 49.251,58.598 47.269,60.579 45.974,60.579 45.974,59.944 46.99,59.944 49.2,57.734
3V3 on L4 "3V3_L04_P044" (solid, pour order 44): 1.016,57.404 4.953,57.404 5.207,57.658 5.207,58.547 6.477,59.817 11.684,59.817 11.938,60.071 11.938,68.199 13.589,69.85 16.891,69.85 16.891,68.072 13.843,68.072 13.208,67.437 13.208,60.071 13.462,59.817 26.949,59.817 27.94,59.817 27.94,57.937 27.94,57.874 35.077,57.848 35.077,56.515 26.035,56.515 26.035,58.547 7.087,58.547 6.401,57.861 6.401,56.566 5.588,55.753 1.016,55.753
3V3 on L4 "3V3_L04_P041" (solid, pour order 41): 16.129,21.717 16.129,18.288 14.478,18.288 14.478,18.542 14.351,18.669 10.16,18.669 10.16,20.879 11.557,20.879 11.557,20.574 12.192,19.939 14.656,19.939 14.656,21.692
3V3 on L4 "3V3_L04_P038" (solid, pour order 38): 26.314,27.449 26.314,34.163 25.019,34.163 25.019,32.842 25.019,27.432
3V3 on L4 "3V3_L04_P037" (solid, pour order 37): 31.115,41.783 30.632,41.3 26.416,37.084 28.537,34.963 29.515,35.941 28.473,36.982 29.972,38.481 30.988,37.465 32.055,38.532 30.912,39.675 32.08,40.843
3V3 on L4 "3V3_L04_P034" (solid, pour order 34): 25.019,27.432 25.019,29.845 29.223,34.049 31.077,32.194 30.455,31.572 29.87,32.156 29.489,32.156 26.924,29.591 26.924,27.457
3V3 on L4 "3V3_L04_P033" (solid, pour order 33): 21.971,22.098 25.908,22.098 25.908,23.241 26.924,24.257 26.924,29.591 25.019,29.591 25.019,27.432 25.654,26.797 25.654,24.892 25.273,24.511 24.257,24.511 23.495,23.749 21.971,23.749
3V3 on L4 "3V3_L04_P030" (solid, pour order 30): 20.447,19.939 25.146,19.939 28.067,17.018 28.067,9.779 25.908,9.779 25.908,11.43 25.222,12.116 8.001,12.116 6.299,10.414 1.473,10.414 1.473,11.811 5.461,11.811 8.763,15.113 12.192,15.113 16.256,15.113 16.51,14.859 16.51,13.716 16.789,13.437 23.876,13.462 25.908,15.164 25.908,16.18 23.774,18.313 20.447,18.313
3V3 on L4 "3V3_L04_P027" (solid, pour order 27): 53.086,28.067 53.086,25.629 49.708,22.25 49.708,7.239 52.807,7.239 52.807,21.412 55.88,24.486 55.88,28.042
3V3 on L4 "3V3_L04_P026" (solid, pour order 26): 73.286,43.307 73.286,43.942 77.35,48.006 77.35,63.5 74.912,63.5 74.937,63.475 74.937,62.103 74.937,60.096 75.166,60.096 75.445,59.817 75.445,48.438 73.236,46.228 71,46.228 71,44.45 70.619,44.069 70.619,43.414 70.462,43.256
3V3 on L4 "3V3_L04_P024" (solid, pour order 24): 67.818,73.533 67.818,64.516 67.539,64.237 67.539,63.881 67.564,63.881 68.072,63.373 69.215,63.373 69.215,61.214 66.472,61.214 65.964,60.706 65.964,59.944 65.964,56.261 62.23,56.261 62.23,60.071 62.611,60.071 64.237,61.697 66.573,61.697 67.259,62.382 67.259,63.017 66.269,64.008 66.294,64.033 66.294,73.533
NetR4_2 on L4 "NETR4_2_L04_P005" (solid, pour order 5): 73.533,34.036 71.12,34.036 71.12,28.448 76.2,28.448 76.2,31.75 73.533,31.75
NetF1_2 on L4 "NETF1_2_L04_P003" (solid, pour order 3): 66.548,34.798 66.548,40.005 69.723,43.18 77.47,43.18 78.105,43.815 78.105,53.34 82.55,57.785 83.795,57.785 83.795,55.88 83.185,55.88 80.01,52.705 80.01,42.545 78.74,41.275 70.485,41.275 69.215,40.005 69.215,34.798
VCC on L4 "VCC_L04_P002" (solid, pour order 2): 82.931,33.782 74.041,33.782 74.041,38.1 82.931,38.1
GND on L2 "GND_L02_P017" (solid, pour order 17): 0,79.985 85.954,79.985 85.954,0.025 0,0.025
GND on L3 "GND_L03_P057" (solid, pour order 57): 5.715,79.375 80.645,79.375 80.645,74.295 85.09,74.295 85.09,5.715 81.407,5.715 80.645,4.953 80.645,0.635 5.715,0.635 5.715,5.715 0.635,5.715 0.635,74.295 5.715,74.295

## Other copper
L1:
  pour cut-out: 61.976,33.401 64.77,33.401 64.77,30.48 61.976,30.48

## Silkscreen, mask and mechanical layers (free items; w line width, h text height)
Mechanical 1:
  the board outline again, w0.2

## Text inside footprints (layer, text, board x,y; h text height)
S2: Top Overlay "1" at 6.35,54.966 h0.5; Top Overlay "ON" at 5.791,63.779 h0.5
X2: Mechanical 1 "Front" at 86.688,29.872 h1.2 r90
X5: Top Overlay "6" at 16.866,73.381 h1.5; Top Overlay "9" at 25.4,73.279 h1.5; Top Overlay "5" at 25.146,65.761 h1.5; Top Overlay "1" at 15.723,65.786 h1.5
X7: Top Overlay "5" at 13.259,10.262 h1.5; Top Overlay "9" at 26.365,6.655 h1.5 r180; Top Overlay "6" at 17.577,6.553 h1.5 r180; Top Overlay "1" at 26.848,12.852 h1.5
X8: Top Overlay "6" at 1.448,63.449 h1.27; Top Overlay "5" at 4.14,63.449 h1.27; Top Overlay "2" at 2.362,55.982 h1.27; Top Overlay "1" at 4.343,53.746 h1.27
X9: Top Overlay "2" at 13.818,16.256 h1.27; Top Overlay "1" at 11.328,13.538 h1.27; Top Overlay "7" at 22.2,13.792 h1.27; Top Overlay "8" at 22.2,16.332 h1.27
X12: Mechanical 1 "FRONT" at 66.126,77.853 h1.88; Mechanical 1 "RIGHT" at 60.408,81.026 h1.88; Mechanical 1 "LEFT" at 72.807,81.039 h1.88; Mechanical 1 "2" at 71.53,62.913 h1.88; Mechanical 1 "4" at 68.99,62.899 h1.88; Mechanical 1 "6" at 66.443,62.899 h1.88; Mechanical 1 "8" at 63.898,62.902 h1.88; Mechanical 1 "7" at 65.172,65.45 h1.88; Mechanical 1 "5" at 67.716,65.451 h1.88; Mechanical 1 "3" at 70.264,65.443 h1.88; Mechanical 1 "1" at 72.807,65.448 h1.88; Mechanical 1 "12" at 62.629,73.719 h1.88; Mechanical 1 "11" at 65.169,74.996 h1.88; Mechanical 1 "10" at 72.806,73.719 h1.88; Mechanical 1 "9" at 75.354,74.994 h1.88